# Allegro board MV5.brd
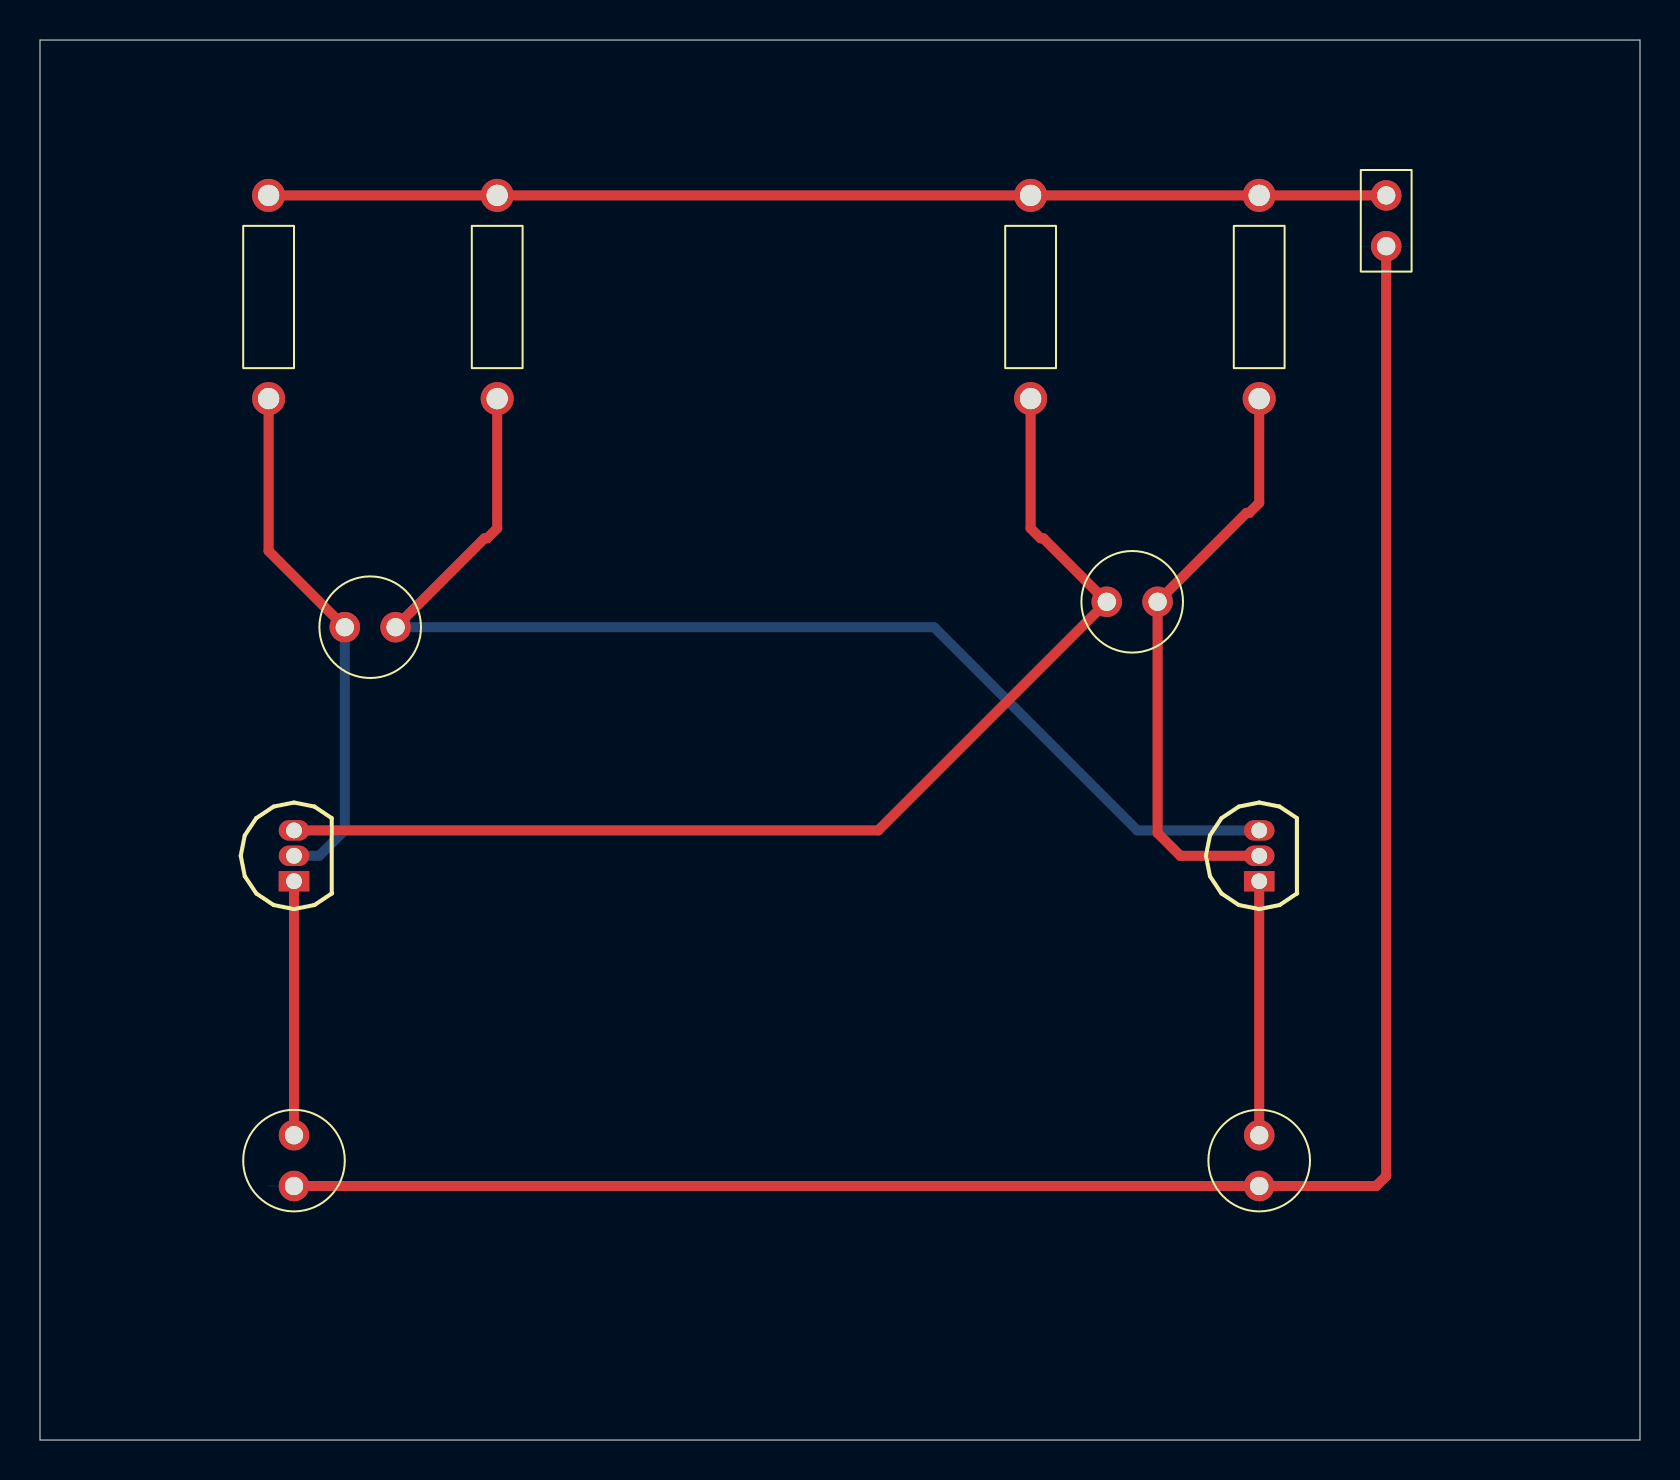
[diagram p0: board, top side]
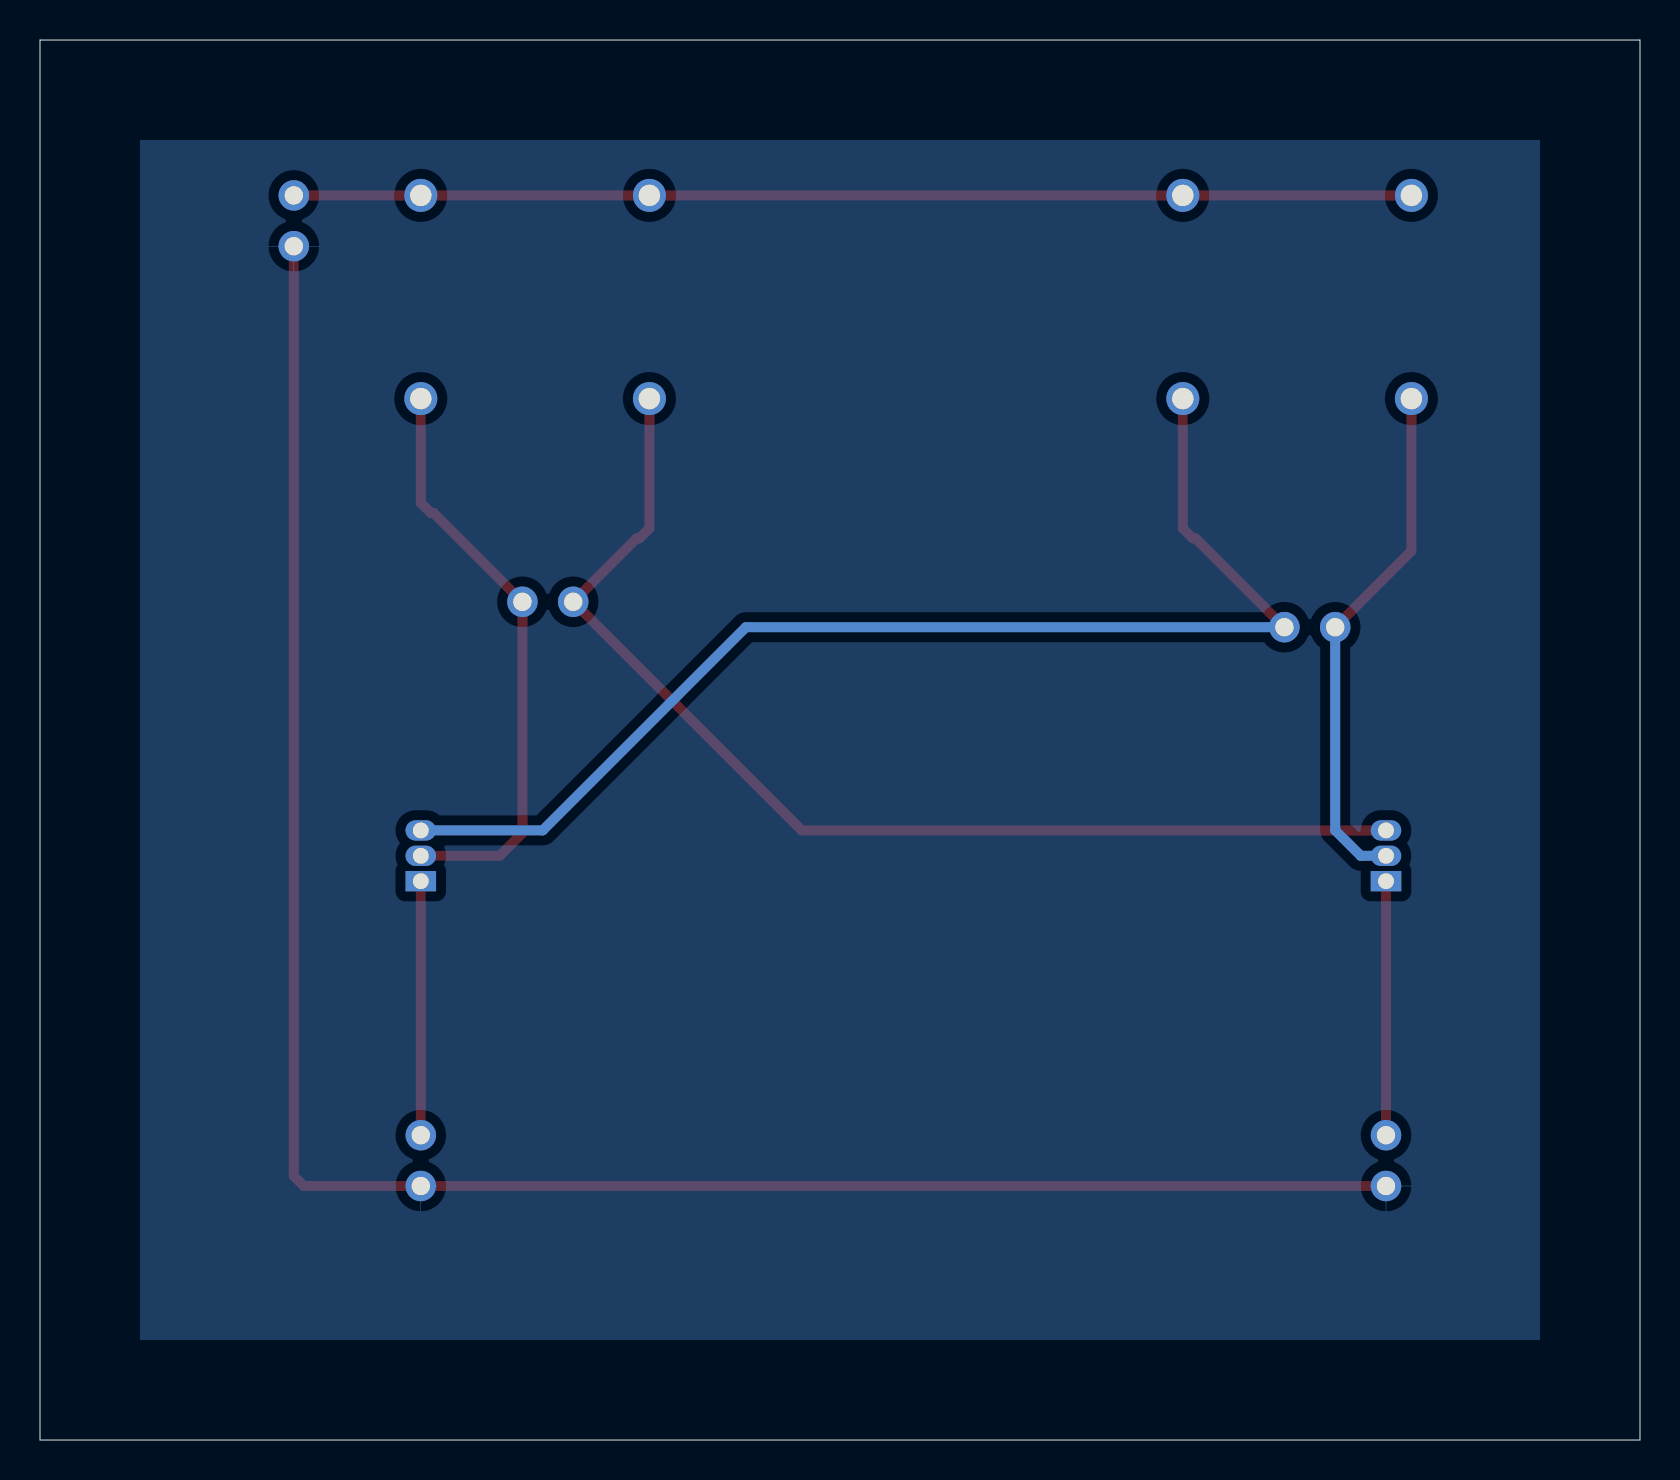
[diagram p1: board, bottom side, seen from below]

Outline 80 x 70 mm; copper layers: TOP, BOTTOM. Coordinates in mm from the lower left corner of the outline.
Outline path: 0,70 0,0 80,0 80,70 0,70

## Design rules (mm)
constraint set DEFAULT: min track width 0.5, pair gap 0.5

## Placement (name value [footprint] x y rotation side)
C1  22u  [CAP196]  15.24 40.64 270 top
C2  22u  [CAP196]  55.88 41.91 90 top
D1  LED  [CAP196]  12.7 12.7 0 top
D2  LED  [CAP196]  60.96 12.7 0 top
J1  CON2  [JUMPER2]  67.31 62.23 270 top
Q1  2SC1815  [TO92]  12.7 27.94 90 top
Q2  2SC1815  [TO92]  60.96 27.94 90 top
R1  220  [RES400]  11.43 62.23 180 top
R2  33k  [RES400]  22.86 62.23 180 top
R3  33k  [RES400]  49.53 62.23 180 top
R4  220  [RES400]  60.96 62.23 180 top

## Library data of the parts
C1 C2 = CAP POL: Tolerance: ***; User Part Number: ***
D1 D2 = LED: Tolerance: ***; User Part Number: ***
J1 = CON2: User Part Number: ***
Q1 Q2 = NPN ECB
R1-R4 = R: Tolerance: ***; User Part Number: ***

## Footprints (pads in the part's own frame, mm; a bottom-side part is the same pattern mirrored in y, then rotated)
CAP196
  round 1.524 hole 0.914: 1(0,0) 2(0,2.54)
JUMPER2
  round 1.524 hole 0.914: 1(0,0) 2(2.54,0)
RES400
  round 1.651 hole 1.067: 1(0,0) 2(0,10.16)
TO92
  rect 1.016x1.524 hole 0.787: 1(0,0)
  oval 1.016x1.524 hole 0.787: 2(1.27,0) 3(2.54,0)

## Nets
GND: D1.1(CATHODE) D2.1(CATHODE) J1.2
VCC: J1.1 R1.1 R2.1 R3.1 R4.1
N00363: C1.1 Q1.2 R1.2
N00370: C1.2 Q2.3 R2.2
N00377: C2.2 Q1.3 R3.2
N00384: C2.1 Q2.2 R4.2
N00399: D2.2 Q2.1(E)
N00403: D1.2 Q1.1(E)

## Routing (per net, layer and track width the routed paths; a pad name or vN(x,y) marks a point on that pad's centre or on a via; arc(x,y) is an arc through that point)
GND: length 113.1
  TOP w0.5: J1.2 67.31,13.2 66.81,12.7 D2.1 D1.1
  BOTTOM w0.013: 11.39,12.7 D1.1 ; D1.1 12.7,11.39 ; D1.1 14.01,12.7 ; 60.96,11.39 D2.1 ; D2.1 59.65,12.7 ; D2.1 62.27,12.7 ; 66,59.69 J1.2 ; J1.2 68.62,59.69 ; J1.2 67.31,58.38
VCC: length 55.9
  TOP w0.5: R1.1 R2.1 R3.1 R4.1 J1.1
N00363: length 26.2
  TOP w0.5: C1.1 11.43,44.45 R1.2
  BOTTOM w0.5: C1.1 15.24,30.48 13.97,29.21 Q1.2
N00370: length 61
  TOP w0.5: R2.2 22.86,45.59 22.36,45.09 22.23,45.09 C1.2
  BOTTOM w0.5: C1.2 44.7,40.64 54.86,30.48 Q2.3
N00377: length 57.2
  TOP w0.5: R3.2 49.53,45.59 50.03,45.09 50.16,45.09 C2.2 41.91,30.48 Q1.3
N00384: length 29.5
  TOP w0.5: Q2.2 57.02,29.21 55.88,30.34 C2.1 60.33,46.35 60.46,46.35 60.96,46.85 R4.2
N00399: length 12.7
  TOP w0.5: Q2.1 D2.2
N00403: length 12.7
  TOP w0.5: Q1.1 D1.2

## Copper pours and planes (outline as drawn; the poured copper is in the pictures)
GND on BOTTOM: 75,5 75,65 5,65 5,5

## Text on the board
TOLERANCE_TOP: FIGURE | FINISHED_SIZE | 0.3302 | 0.7874 | 0.9144 | 1.0668 | DRILL CHART: TOP to BOTTOM | ALL UNITS ARE IN MILLIMETERS | PLATED | QTY | 2 | 6 | 10 | 8
